# Altium PCB 主机电路.pcbdoc
Units mil, origin at the board's own origin, x right, y up, seen from the top; angles counter-clockwise.
Board outline 4630 x 4139 mil, 2 copper layers (Top Layer, Bottom Layer); 22 components, 38 nets, 127 pads, 0 vias.
Unrouted connection lines stored in the file: 10.
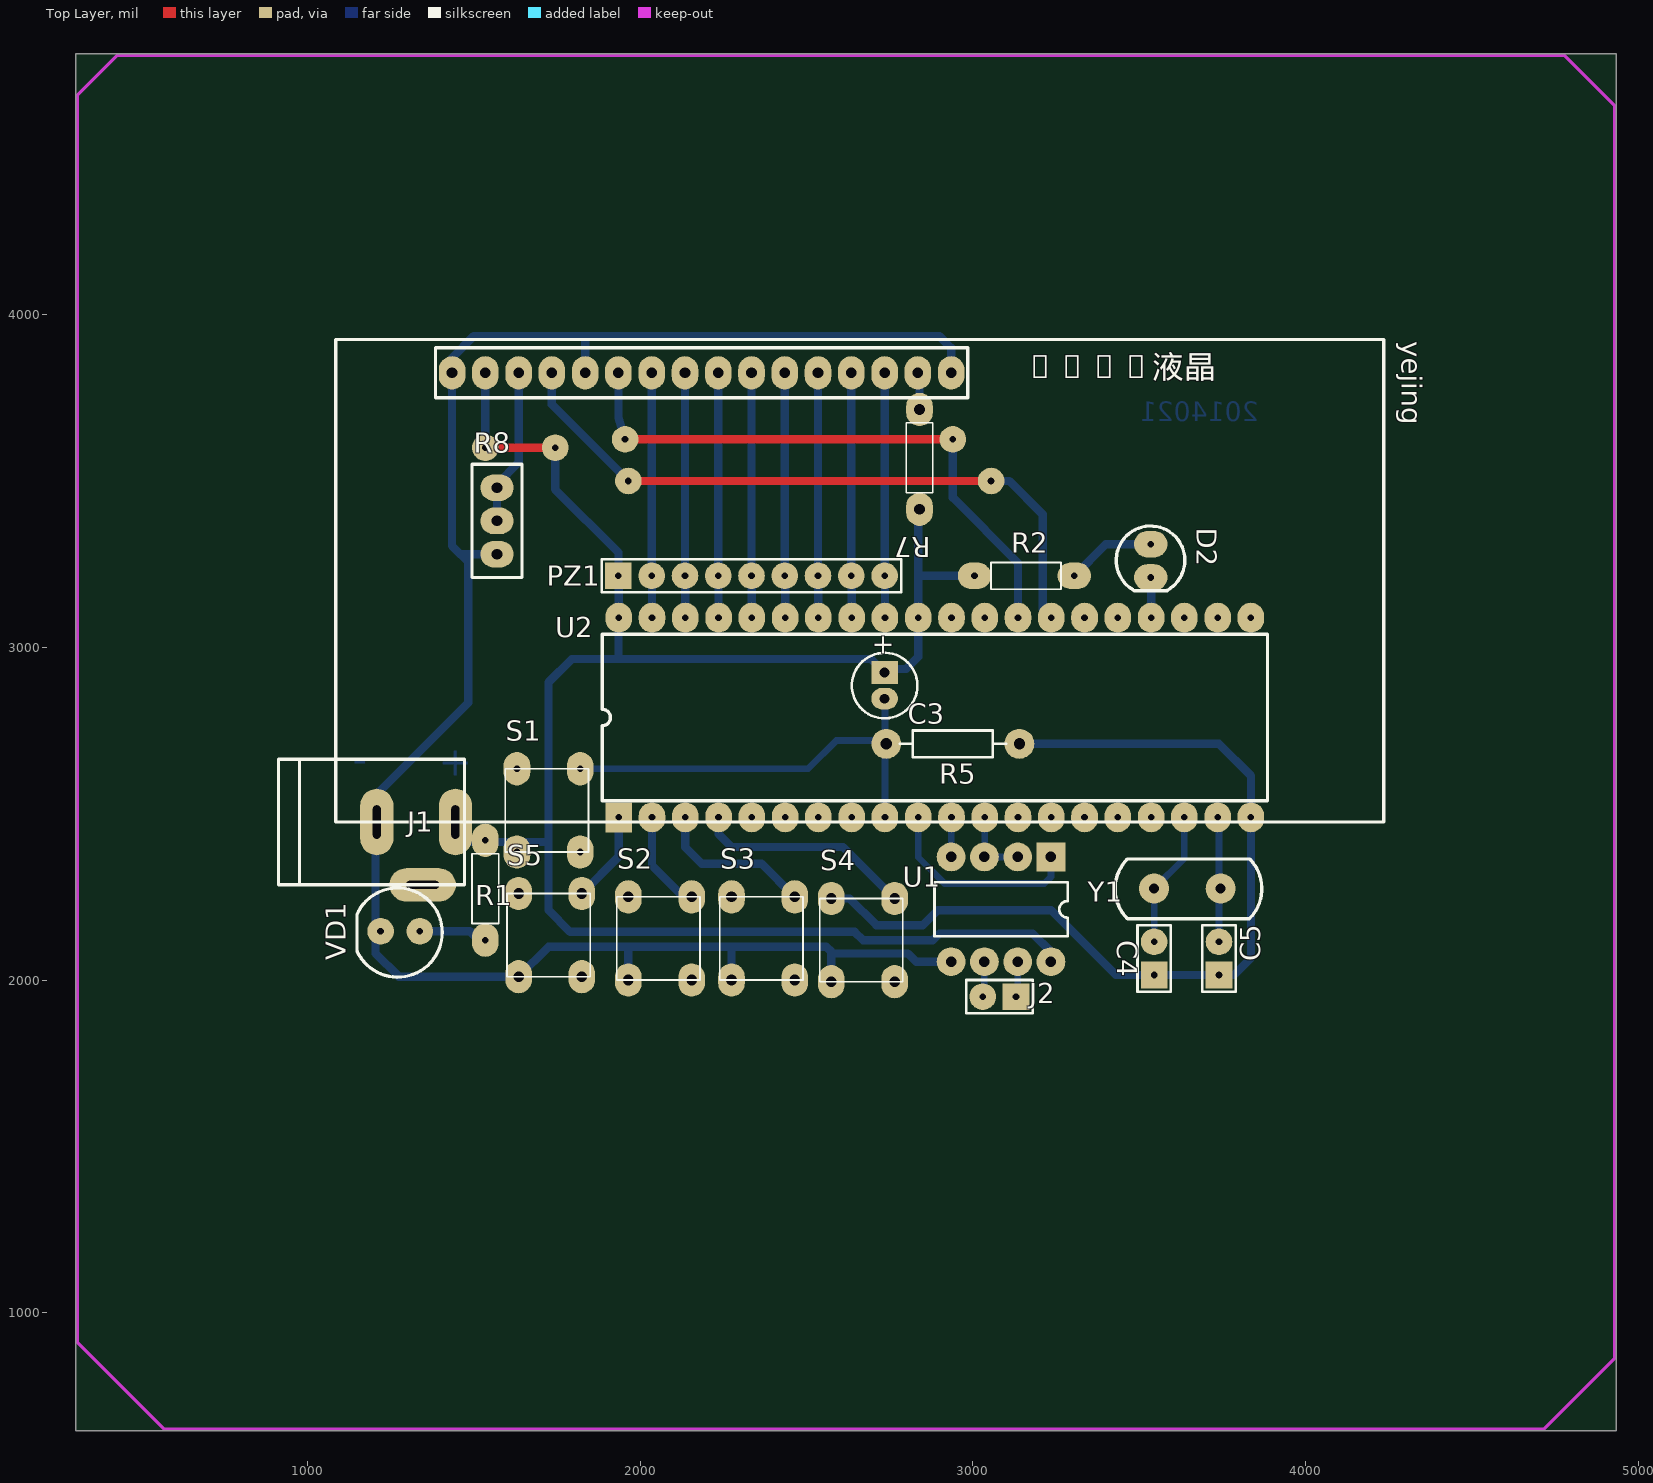
[diagram p0: Top Layer view]
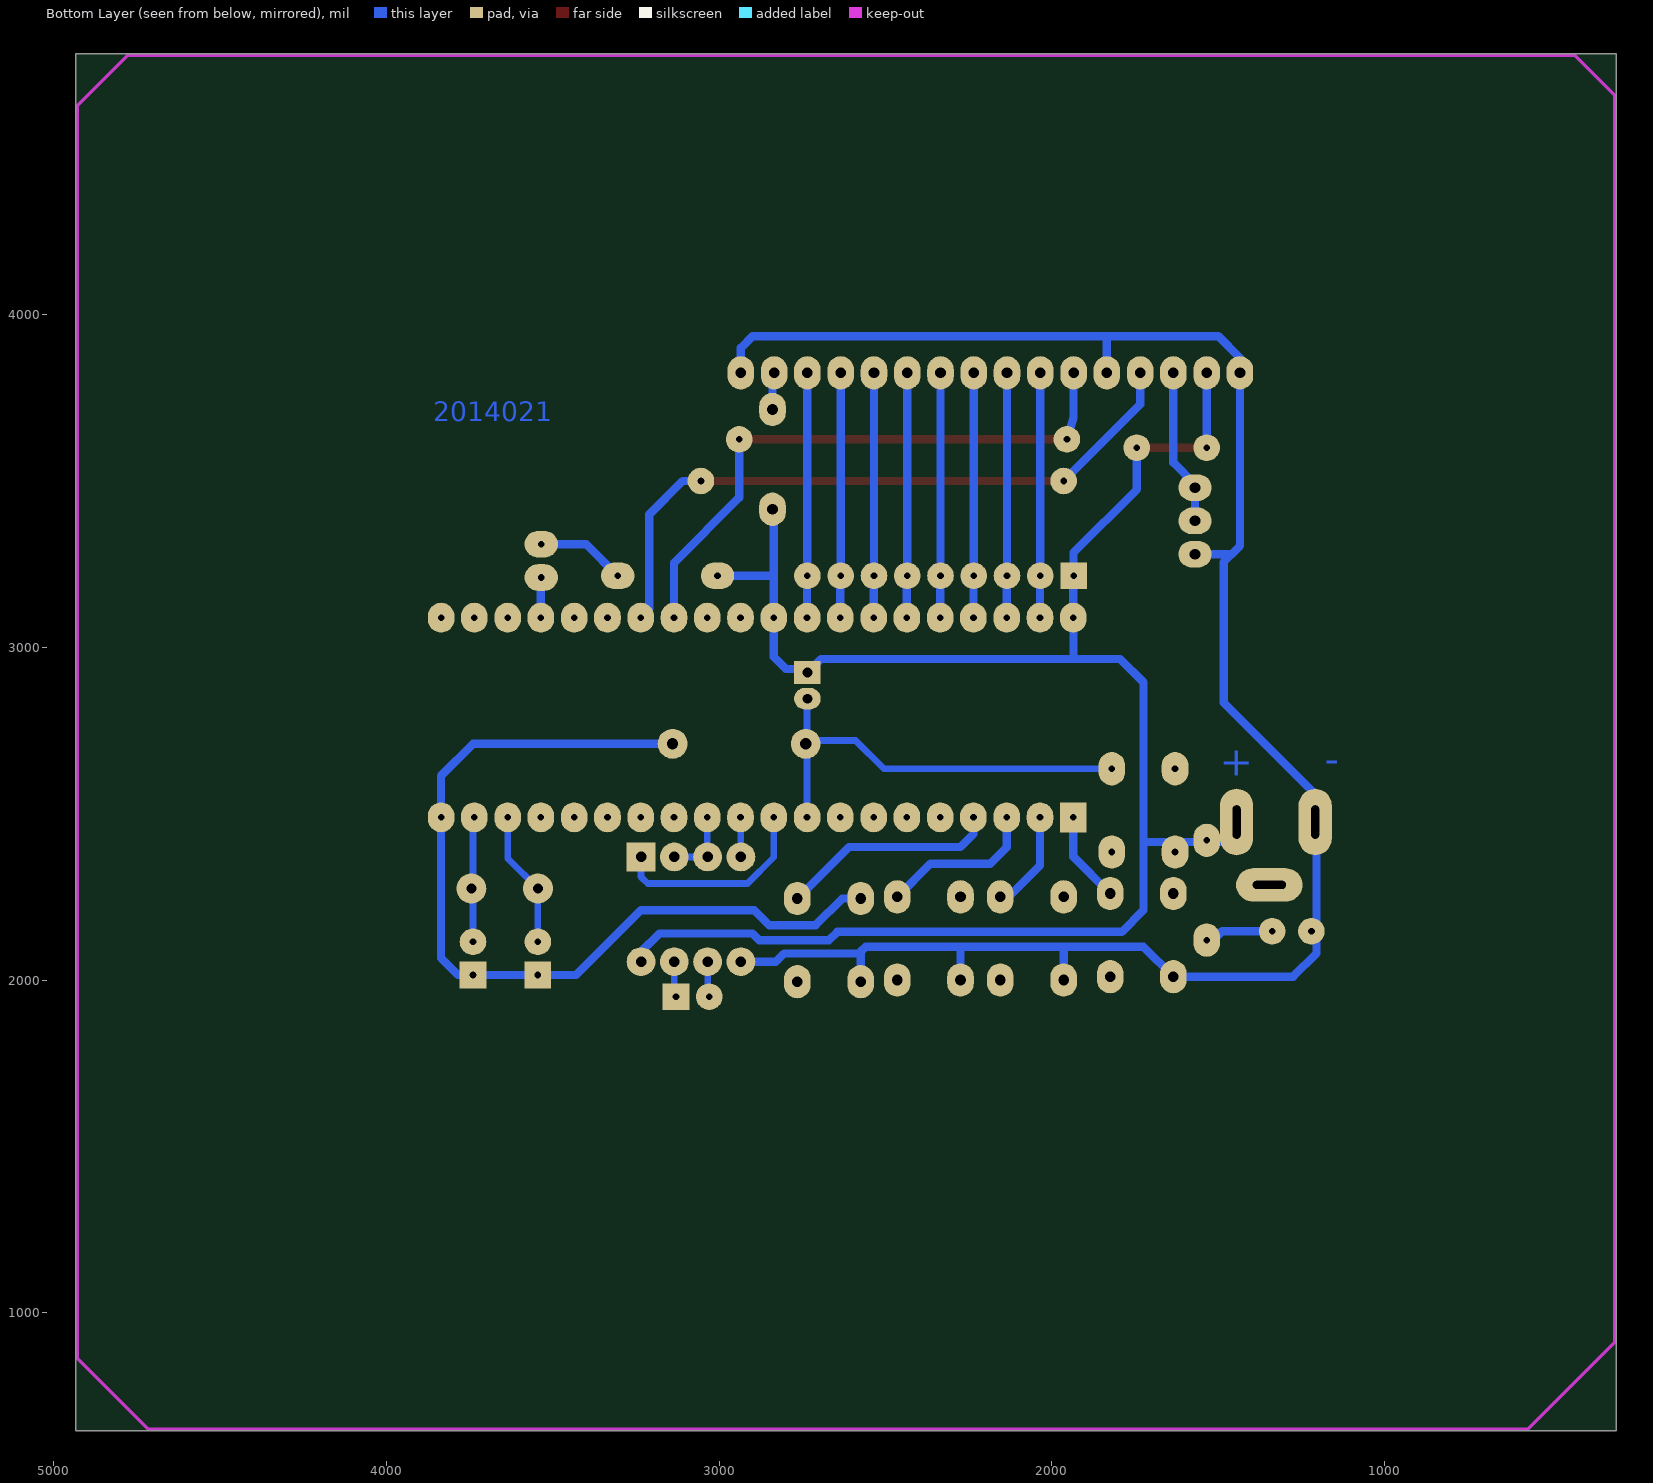
[diagram p1: Bottom Layer view, seen from below]

## Layer stack, top to bottom
Top Layer: signal copper 1.4
Dielectric: dielectric 12.6, FR-4, Dk 4.8
Bottom Layer: signal copper 1.4

## Board outline
304,645 4934,645 4934,4784 304,4784

## Design rules (kind name [scope] priority, off if disabled: settings)
Clearance [All] p1: gap=10
ComponentClearance [All] p1: gap=10 collisioncheckmode=3 verticalgap=10
FanoutControl Fanout_LCC [All] p1 off: bgadir=Out bgaviamode=Centered fanoutstyle=Auto fanoutdirection=Alternating viagrid=1 // Protel DXP Scope 1 Expression Was: IsLCC   Fanout_LCC (Default Rule)
FanoutControl Fanout_BGA [All] p2 off: bgadir=Out bgaviamode=Centered fanoutstyle=Auto fanoutdirection=Alternating viagrid=1 // Protel DXP Scope 1 Expression Was: IsBGA   Fanout_BGA (Default Rule)
FanoutControl Fanout_SOIC [All] p3 off: bgadir=Out bgaviamode=Centered fanoutstyle=Auto fanoutdirection=Alternating viagrid=1 // Protel DXP Scope 1 Expression Was: IsSOIC   Fanout_SOIC (Default Rule)
FanoutControl Fanout_Default [All] p4: bgadir=Out bgaviamode=Centered fanoutstyle=Auto fanoutdirection=Alternating viagrid=1 // Fanout_Default (Default Rule)
FanoutControl Fanout_Small [All] p5 off: bgadir=Out bgaviamode=Centered fanoutstyle=Auto fanoutdirection=Alternating viagrid=1 // Protel DXP Scope 1 Expression Was: (CompPinCount < 5)   Fanout_Small (Default Rule)
PolygonConnect [All] p1: connectstyle=Relief reliefconductorwidth=10 reliefentries=4 polygonreliefangle="90 Angle"
RoutingCorners [All] p1: cornerstyle=Round minsetback=100 maxsetback=100
RoutingVias [All] p1: holewidth=28 width=50 viastyle="Through Hole" minholewidth=28 minwidth=50 maxholewidth=28 maxwidth=50
SolderMaskExpansion [All] p1: expansion=4
TestPointUsage [All] p1: valid=0 allowmultiple=FALSE
Testpoint [All] p1: side=15 testpointundercomponent=TRUE minsize=40 maxsize=100 preferedsize=60 minholesize=0 maxholesize=40 preferedholesize=32 testpointgrid=1 style=1023 order=0123456789
Width vcc [InNet('VCC')] p1: maxlimit=100 minlimit=25 preferedwidth=30
Width GND [InNet('GND')] p2: maxlimit=100 minlimit=25 preferedwidth=50
Width [All] p3: maxlimit=70 minlimit=20 preferedwidth=40
12 further rules are at their usual default settings.

## Components (designator, comment, footprint, x,y, rotation, side; value= is the part's Value field where it differs from the comment)
C3 "4.7uF" B 2735,2885 r270 top
C4 "20P" HDR1X2 3545,2015 r90 top
C5 "20P" HDR1X2 3740,2015 r90 top
D2 "LED0" LED 3535,3310 r270 top
J1 "power" DC-5mm 1445,2475 r0 top
J2 "power" HDR1X2 3130,1950 r180 top
PZ1 "paizu" HDR1X9 1935,3215 r0 top
R1 "1K" res#1 1535,2120 r270 top
R2 "1K" res#1 3005,3215 r180 top
R5 "10K" AXIAL-0.4 2940,2710 r180 top
R7 "Res2" res#2 2840,3415 r270 top
R8 "Res Tap" xtal2 1570,3280 r90 top
S1 "SW-PB" sw#1 1630,2385 r90 top
S2 "SW-PB" sw#2 1965,2000 r90 top
S3 "SW-PB" sw#2 2275,2000 r90 top
S4 "SW-PB" sw#2 2575,1995 r90 top
S5 "SW-PB" sw#2 1635,2010 r90 top
U1 "SN65HVD3082ED/MAX485" DIP8 3235,2370 r270 top
U2 "89S52" DIP40 1936,2489 r90 top locked
VD1 "LED0" led 1425,2050 r180 top
Y1 "12MHz" "晶振 22.1184" 3545,2275 r0 top
yejing "1602" 1602液晶 1435,3825 r0 top locked

## Footprints (in the part's own frame and the unit in brackets; to place one, negate y for a bottom-side part, rotate by r counter-clockwise, add the part's x,y. Pads: shape width x height; smd on the part's side, far side on the other; paste and mask are expansions set on the pad)
1602液晶 [mil]
  oval 80x100 hole 32: 1(0,0) 2(100,0) 3(200,0) 4(300,0) 5(400,0) 6(500,0) 7(600,0) 8(700,0) 9(800,0) 10(900,0) 11(1000,0) 12(1100,0) 13(1200,0) 14(1300,0) 15(1400,0) 16(1500,0)
  silkscreen extent -350,-1350 2800,100
AXIAL-0.4 [mil]
  round 90 hole 33.46: 1(-200,0) 2(200,0)
  silkscreen extent -160,-40 160,40
B [mil]
  rect 70x80 hole 29.53: 1(-39.37,0)
  oval 65x80 hole 29.53: 2(39.37,0)
  silkscreen extent -98,-98 98,98
DC-5mm [mm]
  oval 2.54x5.08 hole 0.6 slot 2.54 at 90 deg: 1(0,0) 2(-6,0)
  oval 5.08x2.54 hole 0.6 slot 2.54 at 0 deg: 3(-2.5,-4.8)
  silkscreen extent -13.5,-4.8 0.7,4.8
DIP8 [mm]
  rect 2.2x2.2 hole 0.8: 1(0,0)
  round 2.2 hole 0.8: 2(0,-2.54) 3(0,-5.08) 4(0,-7.62) 5(8,-7.62) 6(8,-5.08) 7(8,-2.54) 8(8,0)
  silkscreen extent 1.93,-8.89 6.06,1.27
DIP40 [mil]
  rect 90x80 hole 20: 1(0,0)
  oval 90x80 hole 20: 2(0,-100) 3(0,-200) 4(0,-300) 5(0,-400) 6(0,-500) 7(0,-600) 8(0,-700) 9(0,-800) 10(0,-900) 11(0,-1000) 12(0,-1100) 13(0,-1200) 14(0,-1300) 15(0,-1400) 16(0,-1500) 17(0,-1600) 18(0,-1700) 19(0,-1800) 20(0,-1900) 21(600,-1900) 22(600,-1800) 23(600,-1700) 24(600,-1600) 25(600,-1500) 26(600,-1400) 27(600,-1300) 28(600,-1200) 29(600,-1100) 30(600,-1000) 31(600,-900) 32(600,-800) 33(600,-700) 34(600,-600) 35(600,-500) 36(600,-400) 37(600,-300) 38(600,-200) 39(600,-100) 40(600,0)
  silkscreen extent 50,-1950 550,50
HDR1X2 [mil]
  rect 80x80 hole 20: 1(0,0)
  round 80 hole 20: 2(100,0)
  silkscreen extent -50,-50 150,50
HDR1X9 [mil]
  rect 80x80 hole 20: 1(0,0)
  round 80 hole 20: 2(100,0) 3(200,0) 4(300,0) 5(400,0) 6(500,0) 7(600,0) 8(700,0) 9(800,0)
  silkscreen extent -50,-50 850,50
LED [mil]
  oval 80x100 hole 20: 1(0,0) 2(100,0)
  silkscreen extent -55,-104 140,102
led [mil]
  round 80 hole 20: 1(204.88,-96.69) 2(86.77,-96.69)
  silkscreen extent 20,-227 276,41
res#1 [mil]
  oval 100x80 hole 20: 1(0,0) 2(-300,0)
  silkscreen extent -260,-40 -50,40
res#2 [mil]
  oval 100x80 hole 32: 1(0,0) 2(-300,0)
  silkscreen extent -260,-40 -50,40
sw#1 [mil]
  oval 100x80 hole 20: 1(0,0) 1(250,0) 2(0,-190) 2(250,-190)
  silkscreen extent 0,-215 250,35
sw#2 [mil]
  oval 100x80 hole 32: 1(0,0) 1(250,0) 2(0,-190) 2(250,-190)
  silkscreen extent 0,-215 250,35
xtal2 [mil]
  oval 80x100 hole 32: 1(0,0) 2(200,0) 3(100,0)
  silkscreen extent -70,-75 270,75
"晶振 22.1184" [mil]
  round 90 hole 30: 1(0,0) 2(200,0)
  silkscreen extent -117,-91 324,89

## Part data
D2: "Typical INFRARED GaAs LED"
R2: library part Res2, "Resistor"
R7: "Resistor"
R8: "Tapped Resistor"
S2 S3 S4 S5: "Switch"

## Free pads (board coordinates)
  round 80 hole 20: 0(1535,3600) 1(1745,3600) 2(1955,3625) 3(1965,3500) 4(2940,3625) 5(3055,3500)

## Nets (pads, with @x,y where several pads share a name; then routed paths per layer and width w, separated by ;. In a path a pad name is that pad's centre, name@x,y a point inside that pad or via, vN(x,y) a via of type N, cw(c..) or ccw(c..) an arc to the next point about the centre after c; other vN are vias at no path point)
GND: C4.1 C5.1 J1.2 R5.1 R8.1 S2.1 S3.1 S4.1 S5.1 U1.5 U2.20 VD1.1 yejing.1 yejing.5 yejing.16 | length 8563.4
  Bottom Layer w25: 1460,3280 R8.1 ; yejing.5 1835,3935 ; S2.1@1965,2000 1965,2100 ; S3.1@2275,2000 2275,2100 ; S4.1@2575,1995 2575,2085 2560,2100 1725,2100 1635,2010 1275,2010 1205,2080 1205,2555 1483.82,2833.82 1483.82,3256.18 1435,3305 1435,3870 1500,3935 2900,3935 2935,3900 yejing.16 ; 2575,2080 2805,2080 2829.96,2055.04 U1.5 ; S4.1@2575,2245 2630,2245 2710,2165 2850,2165 2895,2210 3235,2210 3430,2015 3785,2015 3836,2066 3836,2614 3740,2710 R5.1
NetD2_1: D2.1 R2.2 | length 269.4
  Bottom Layer w25: R2.2 3400,3310 D2.1
NetD2_2: D2.2 U2.24 | length 121.4
  Bottom Layer w25: D2.2 3536,3209 U2.24
NetJ2_1: J2.1 U1.7 | length 65
  Bottom Layer w20: J2.1@3135,1950 U1.7@3135,2015.04
NetJ2_2: J2.2 U1.6 | length 65
  Bottom Layer w20: J2.2@3035,1950 U1.6@3035,2015.04
NetR1_1: R1.1 VD1.2 | length 194.9
  Bottom Layer w25: VD1.2 1488.31,2146.69 R1.1@1520,2115
NetR7_2: R7.2 yejing.15 | length 112.1
  Bottom Layer w25: yejing.15 2840,3820 R7.2
NetR8_2: R8.2 R8.3 yejing.3 | length 471.9
  Bottom Layer w25: R8.3 1570,3490 1635,3555 yejing.3
OS1: C5.2 U2.19 Y1.2 | length 375.7
  Bottom Layer w20: U2.19 3740,2485 C5.2
OS2: C4.2 U2.18 Y1.1 | length 411.7
  Bottom Layer w20: C4.2 Y1.1 3636,2366 U2.18
P00: PZ1.2 U2.39 yejing.7 | length 736.4
  Bottom Layer w25: yejing.7 PZ1.2 2036,3214 U2.39
P01: PZ1.3 U2.38 yejing.8 | length 736.4
  Bottom Layer w25: yejing.8 PZ1.3 2136,3214 U2.38
P02: PZ1.4 U2.37 yejing.9 | length 736.4
  Bottom Layer w25: yejing.9 PZ1.4 2236,3214 U2.37
P03: PZ1.5 U2.36 yejing.10 | length 736.4
  Bottom Layer w25: yejing.10 PZ1.5 2336,3214 U2.36
P04: PZ1.6 U2.35 yejing.11 | length 736.4
  Bottom Layer w25: yejing.11 PZ1.6 2436,3214 U2.35
P05: PZ1.7 U2.34 yejing.12 | length 736.4
  Bottom Layer w25: yejing.12 PZ1.7 2536,3214 U2.34
P06: PZ1.8 U2.33 yejing.13 | length 736.4
  Bottom Layer w25: yejing.13 PZ1.8 2636,3214 U2.33
P07: PZ1.9 U2.32 yejing.14 | length 736.4
  Bottom Layer w25: yejing.14 PZ1.9 2736,3214 U2.32
P10: S5.2 U2.1 | length 275
  Bottom Layer w25: S5.2@1825,2260 1936,2371 U2.1
P11: S2.2 U2.2 | length 302.9
  Bottom Layer w25: U2.2 2036,2344 2130,2250 S2.2@2155,2250
P12: S3.2 U2.3 | length 480.7
  Bottom Layer w25: U2.3 2136,2399 2185,2350 2365,2350 S3.2@2465,2250
P13: S4.2 U2.4 | length 659.4
  Bottom Layer w25: U2.4 2236,2439 2275,2400 2610,2400 S4.2@2765,2245
P14: U2.5
P15: U2.6
P16: U2.7
P17: U2.8
P26: pad.3 pad.5 U2.27 yejing.4 | length 2038.5
  Top Layer w25: pad.3 pad.5@3065,3500
  Bottom Layer w25: yejing.4 1735,3730 pad.3 ; pad.5 3110,3500 3210,3400 3210,3115 U2.27
P27: pad.2 pad.4 U2.28 yejing.6 | length 1805.2
  Top Layer w25: pad.2 pad.4
  Bottom Layer w25: yejing.6 1935,3690 pad.2 ; pad.4 2940,3450 3136,3254 U2.28
P32: U1.2 U1.3 U2.12 | length 218.8
  Bottom Layer w20: U2.12@3035,2488 U2.12 3036,2371 3037,2370 U1.2
P33: U2.13
P34: U2.14
P35: U2.15
P36: U2.16
P37: U2.17
RESET: C3.2 R5.2 S1.2 U2.9 | length 1307.8
  Bottom Layer w20: S1.2@1820,2635 2505,2635 2590,2720 R5.2@2736,2720 ; U2.9 C3.2@2736,2845.63
RXD: U1.1 U2.10 | length 580
  Bottom Layer w20: U2.10 2836,2369 2915,2290 3215,2290 3235,2310 U1.1@3235,2330
TXD: U1.4 U2.11 | length 119.4
  Bottom Layer w20: U1.4 2935,2488 U2.11
VCC: C3.1 J1.1 pad.0 pad.1 PZ1.1 R1.2 R2.1 R7.1 S1.1 U1.8 U2.31 U2.40 yejing.2 | length 5514.4
  Top Layer w25: pad.0 pad.1
  Bottom Layer w25: J1.1@1435,2415 1725,2415 ; pad.0 yejing.2 ; pad.1 1745,3475 1935,3285 PZ1.1 1936,3214 U2.40 ; 1935,2965 U2.40@1935,3089 ; 2836,3215 R2.1 ; R7.1 2836,3411 2836,2971 2800,2935 2724.37,2935 2694.37,2965 1795,2965 1725,2895 1725,2210 1790,2145 2645,2145 2670,2120 2880,2120 2900,2140 3180,2140 3235,2085 U1.8
pads on no net: J1.3 U2.21 U2.22 U2.23 U2.25 U2.26 U2.29 U2.30

## Keep-outs
Keep-Out Layer:
  lines w10: 777,4779 4778,4779 4929,4628 4929,863 4716,650 570,650 309,911 309,4660 428,4779 800,4779

## Other copper
Bottom Layer:
  text "2014021" at 3860,3660 h100
  text "-" at 1180,2595 h150
  text "+" at 1495,2585 h150

## Text inside footprints (layer, text, board x,y; h text height)
C3: Top Overlay "+" at 2705.47,3041.5 h59.06 r270
yejing: Top Overlay "1602液晶" at 3155,3785 h120